# Altium PCB fosna.PcbDoc
Units mm, origin at the board's own origin, x right, y up, seen from the top; angles counter-clockwise.
Board outline 59.44 x 73.91 mm, 2 copper layers (Top Layer, Bottom Layer); 23 components, 31 nets, 131 pads, 21 vias.
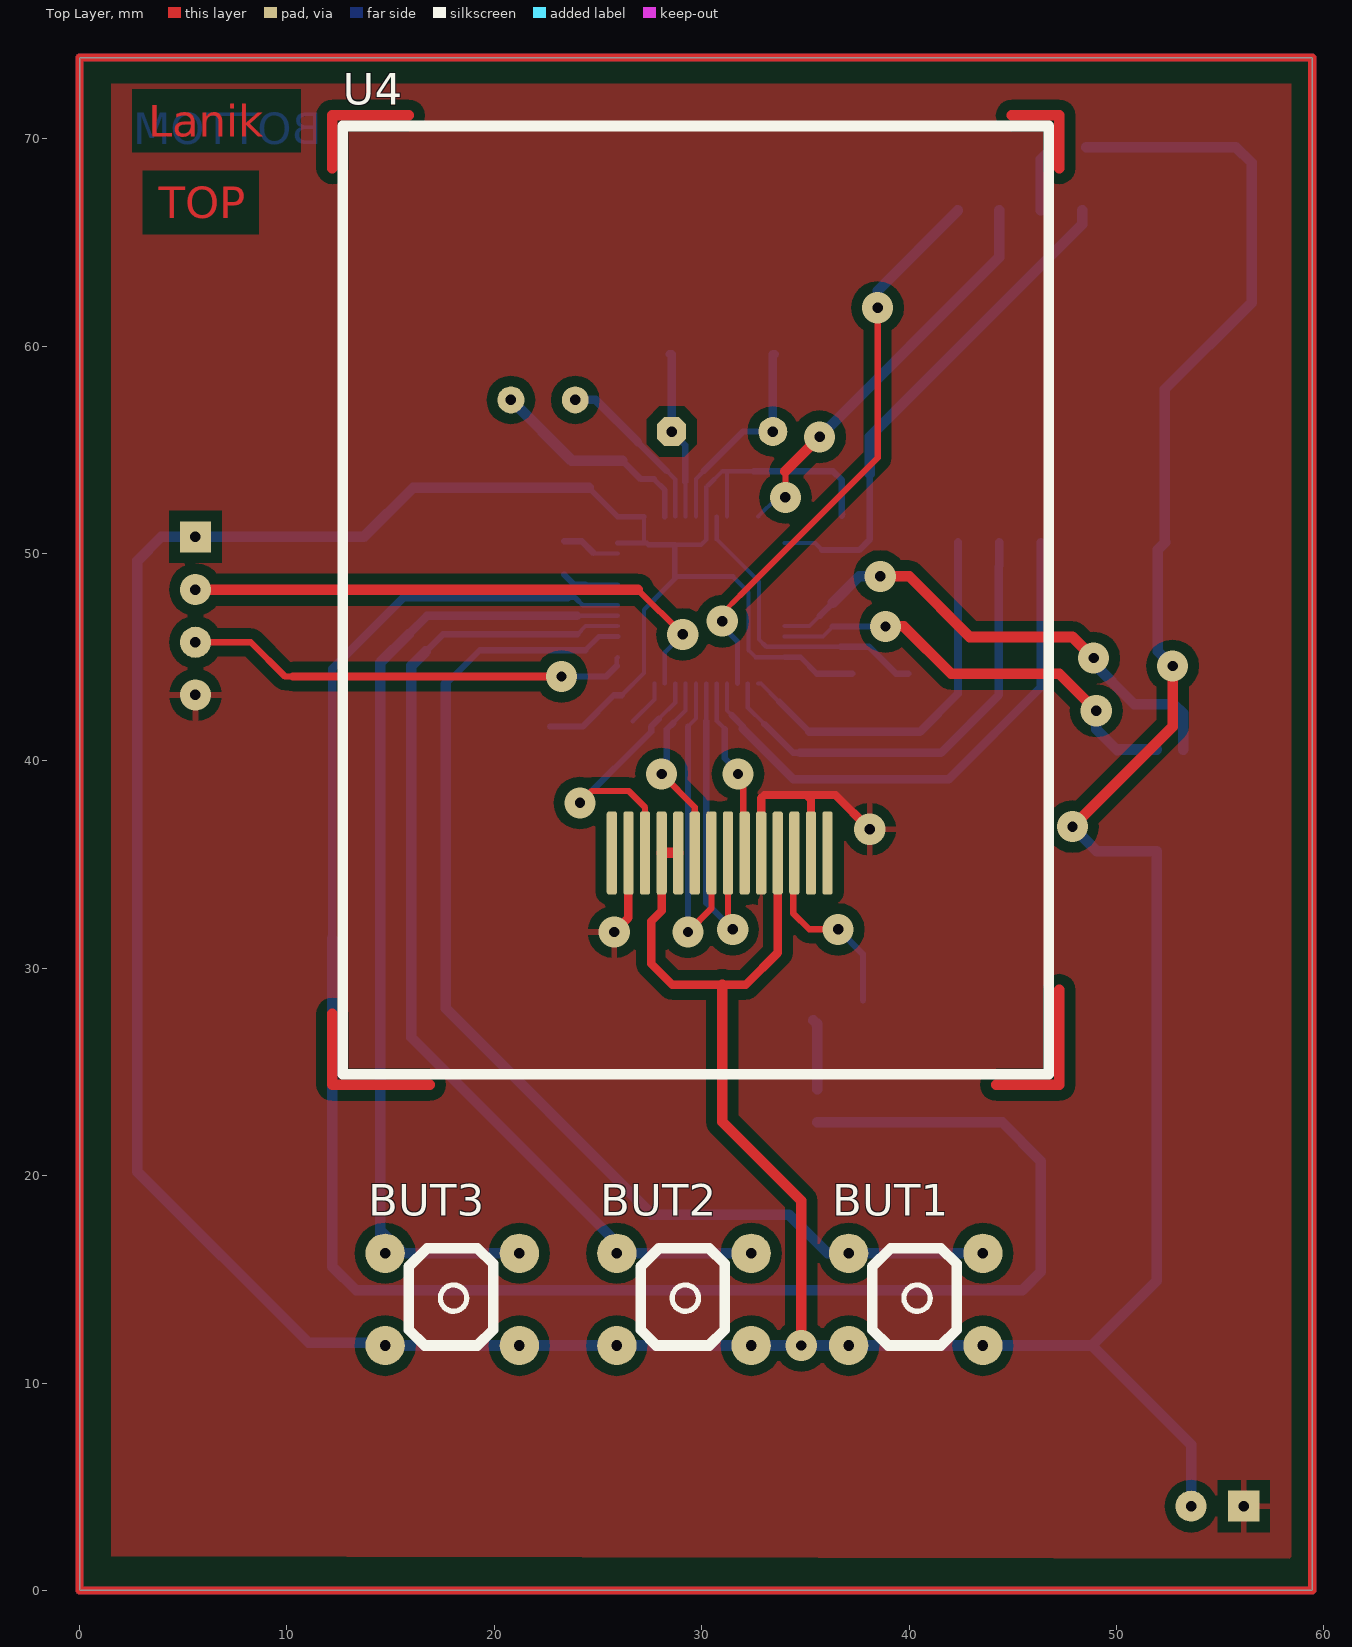
[diagram p0: Top Layer view]
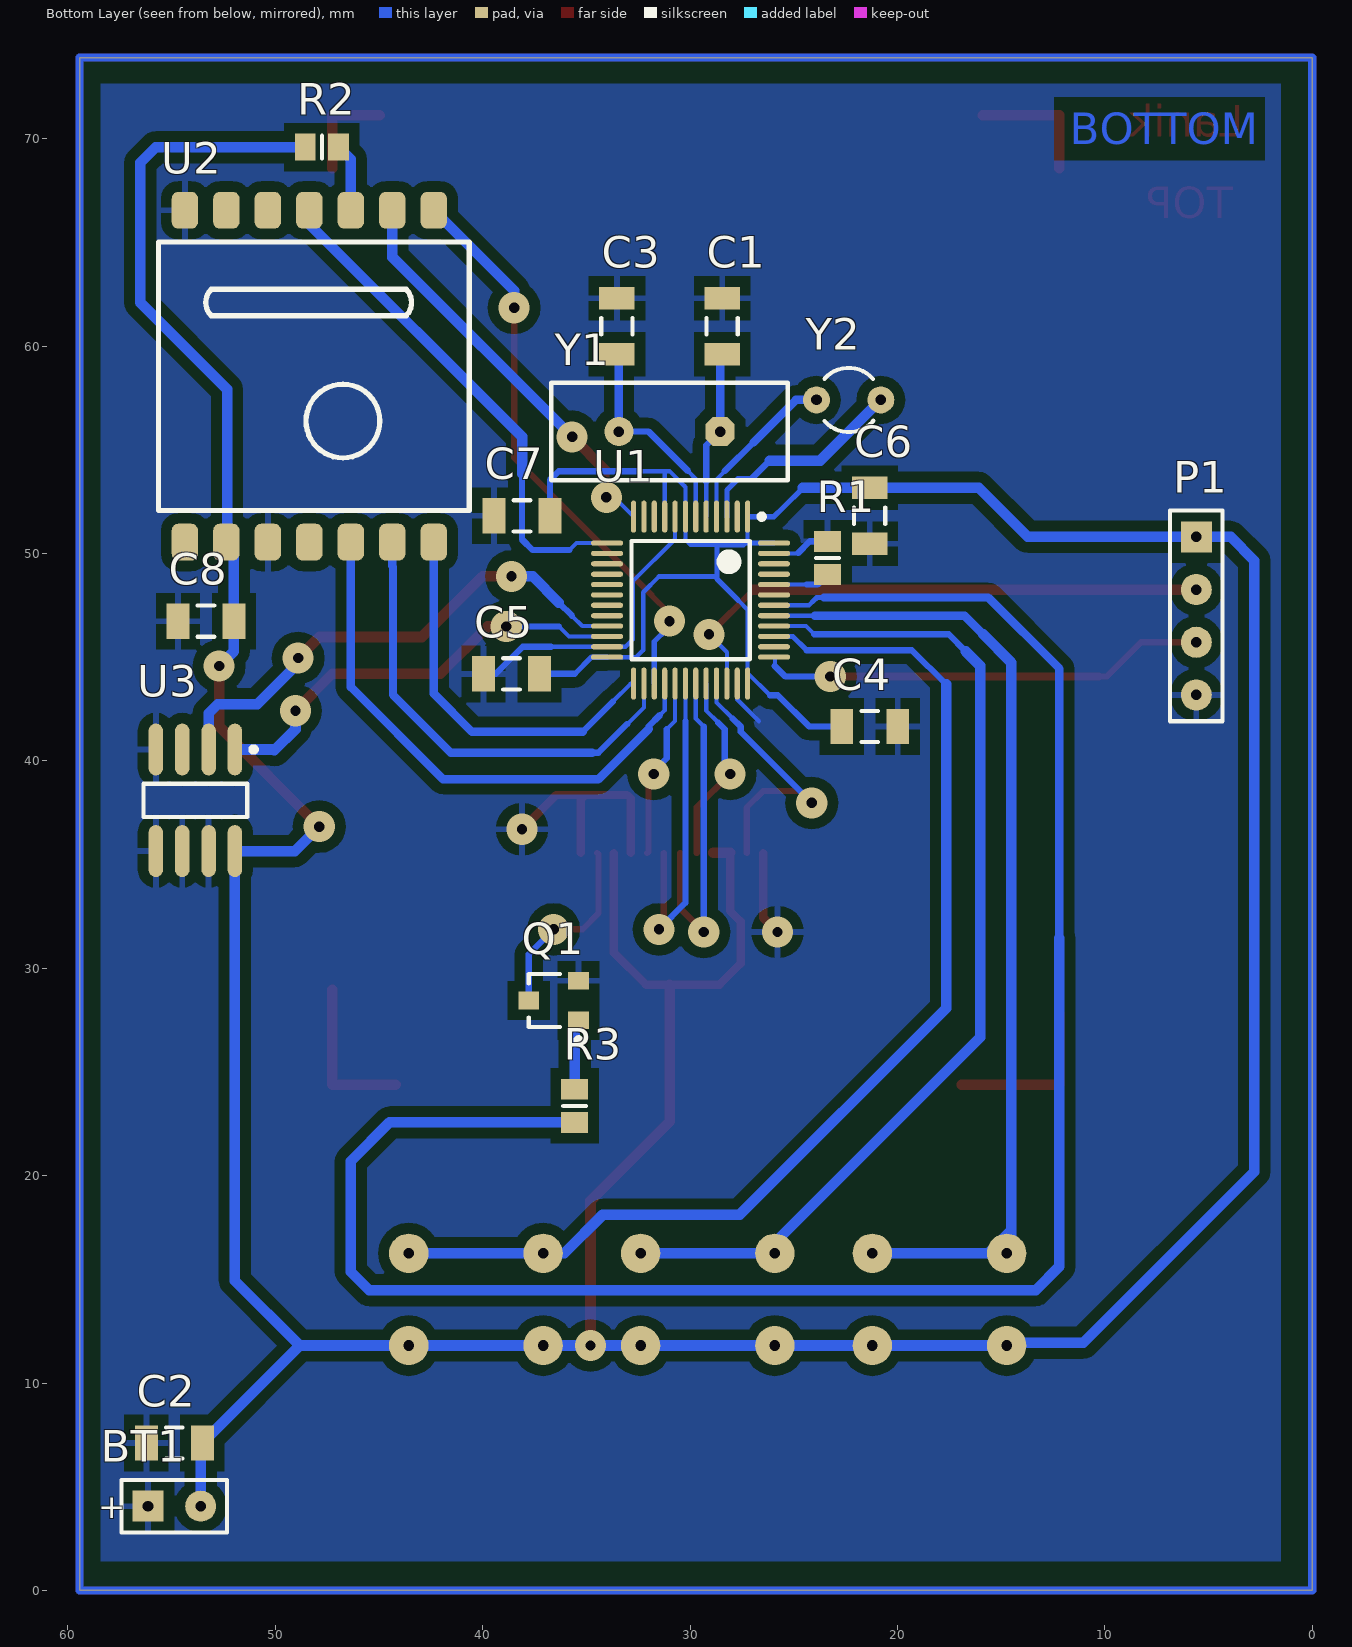
[diagram p1: Bottom Layer view, seen from below]

## Layer stack, top to bottom
Top Layer: signal copper 0.0356
Dielectric: dielectric 0.32, FR-4, Dk 4.8
Bottom Layer: signal copper 0.0356

## Board outline
0,0 0,73.914 59.436,73.914 59.436,0 0,0

## Design rules (kind name [scope] priority, off if disabled: settings)
AssemblyTestPointUsage [All] p1 off:
AssemblyTestpoint [All] p1 off: testpointundercomponent=TRUE minsize=1.016 maxsize=2.54 preferedsize=1.524 minholesize=0 maxholesize=1.016 preferedholesize=0.813 testpointgrid=0.025 usegrid=TRUE gridtolerance=0 allowsidetop=TRUE allowsidebottom=TRUE
Clearance Clearance_1 [(ObjectKind = 'Track') and innet(GND) vs Inpoly] p1: gap=-0.025
Clearance polygon [InPoly] p2: gap=0.508
Clearance mcu [withinroom('room_mcu')] p3: gap=0.203
Clearance displej [withinroom(room_displej)] p4: gap=0.254
Clearance [All] p5: gap=0.305
FabricationTestPointUsage [All] p1 off: valid=0 allowmultiple=FALSE
FabricationTestpoint [All] p1 off: side=3 testpointundercomponent=TRUE minsize=1.016 maxsize=2.54 preferedsize=1.524 minholesize=0 maxholesize=1.016 preferedholesize=0.813 testpointgrid=0.025 allowsidetop=TRUE allowsidebottom=TRUE usegrid=TRUE gridtolerance=0
HoleSize [All] p1 off: absolutevalues=TRUE maxlimit=2.54 minlimit=0.025 maxpercent=80.000 minpercent=20.000
HoleToHoleClearance [All] p1 off: gap=0.254 allowstackedmicrovias=TRUE
LayerPairs [All] p1 off: enforce=TRUE
MinimumSolderMaskSliver [All] p1 off: minsoldermaskwidth=0.254
NetAntennae [All] p1 off: netantennaetolerance=0
PasteMaskExpansion [All] p1 off: expansion=0
PolygonConnect [All] p1: connectstyle=Relief reliefconductorwidth=0.305 reliefentries=4 polygonreliefangle="90 Angle"
RoomDefinition room_displej [All] p1: confinementstyle=ConfineOut formatcopy=TRUE lockcomponents=FALSE outline 24.511,31.877 37.973,31.877 37.973,38.608 24.511,38.608
RoomDefinition room_mcu [InComponentClass('Components Class 1')] p2: confinementstyle=ConfineIn formatcopy=TRUE lockcomponents=FALSE outline 23.368,41.402 37.338,41.402 37.338,54.356 23.368,54.356
RoomDefinition main [InComponentClass('main')] p3: confinementstyle=ConfineIn formatcopy=TRUE lockcomponents=FALSE outline 0,65.405 59.309,65.405 59.309,0 0,0
RoomDefinition rfm [InComponentClass('rfm')] p4: confinementstyle=ConfineIn formatcopy=TRUE lockcomponents=FALSE outline 0,9.779 59.436,9.779 59.436,73.914 0,73.914
RoutingVias [All] p1: holewidth=0.5 width=1.7 viastyle="Through Hole" minholewidth=0.5 minwidth=1.5 maxholewidth=0.5 maxwidth=1.7
SilkToSilkClearance [All] p1 off: silktosilkclearance=0.254
SilkscreenOverComponentPads [All] p1 off: minsilkscreentomaskgap=0.254
SolderMaskExpansion [All] p1 off: expansion=0.102
Width mcu_width [WithinRoom('room_mcu')] p1: maxlimit=0.305 minlimit=0.203 preferedwidth=0.254
Width [All] p2: maxlimit=0.508 minlimit=0.305 preferedwidth=0.406 minimp=50.000000 maximp=50.000000 favimp=50.000000
16 further rules are at their usual default settings.

## Classes and differential pairs
component class "Components Class 1": U1
component class main: BT1 C1 C2 C3 C4 C5 C6 C7 P1 R1 U1 Y1 Y2
component class rfm: BUT1 BUT2 BUT3 C8 Q1 R2 R3 U2 U3 U4

## Components (designator, comment, footprint, x,y, rotation, side; value= is the part's Value field where it differs from the comment)
BT1 "Battery" BAT-2 54.864,4.064 r180 bottom
BUT1 "Tlacitko" TLACITKO 37.084,16.256 r0 top
BUT2 "Tlacitko" TLACITKO 25.908,16.256 r0 top
BUT3 "Tlacitko" TLACITKO 14.732,16.256 r0 top
C1 "Cap Semi" CAPC3216L 28.448,60.96 r90 bottom
C2 "Cap Semi" CAPC3216L 54.864,7.112 r180 bottom
C3 "Cap Semi" CAPC3216L 33.528,60.96 r90 bottom
C4 "Cap Semi" CAPC3216L 21.336,41.656 r0 bottom
C5 "Cap Semi" CAPC3216L 38.608,44.196 r180 bottom
C6 "Cap Semi" CAPC3216L 21.336,51.816 r90 bottom
C7 "Cap Semi" CAPC3216L 38.1,51.816 r180 bottom
C8 "Cap Semi" CAPC3216L 53.34,46.736 r0 bottom
P1 "Header 4" HDR1X4 5.588,50.8 r270 bottom
Q1 "BC817-40" SOT-23A 36.576,28.448 r90 bottom
R1 "Res Semi" RESC2012L 23.368,49.784 r90 bottom
R2 "Res Semi" RESC2012L 47.752,69.596 r0 bottom
R3 "Res Semi" RESC2012L 35.56,23.368 r270 bottom
U1 "STM32F101C6T6" LQFP48_L 29.972,47.752 r270 bottom
U2 "RFM12B" PCBComponent_1 54.356,66.548 r270 bottom
U3 "STLM75M2E" SO8_M 53.848,38.1 r270 bottom
U4 "ST7735" ST7735_DESKA 36.068,35.56 r0 top locked
Y1 "8MHz" HC-49U 30.988,55.88 r0 bottom
Y2 "32,768KHz" BCY-W2/D3.1 22.352,57.404 r90 bottom

## Footprints (in the part's own frame and the unit in brackets; to place one, negate y for a bottom-side part, rotate by r counter-clockwise, add the part's x,y. Pads: shape width x height; smd on the part's side, far side on the other; paste and mask are expansions set on the pad)
BAT-2 [mm] "Multicell Battery; 2 Leads"
  rect 1.5x1.5 hole 0.508: 1(-1.27,0)
  round 1.5 hole 0.508: 2(1.27,0)
  silkscreen extent -2.54,-1.27 2.54,1.27
BCY-W2/D3.1 [mm] "Crystal, Thru-Hole; 2 Leads; Body 3.1 x 8.2 mm (Dia.xH)"
  round 1.3 hole 0.508: 1(0,1.55) 2(0,-1.55)
  silkscreen extent -1.55,-1.19 1.55,1.17
CAPC3216L [mm] "Chip Capacitor, Body 3.2x1.6mm, IPC High Density"
  rect 1.1x1.7 smd: 1(-1.35,0) 2(1.35,0)
  silkscreen extent -0.4,-0.75 0.4,0.75, body extent -1.7,-0.9 1.7,0.9, height 1.3
HC-49U [mm] "Quartz Crystal, Thru-Hole; 2 Leads; Body 11.35 x 4.65 x 13.46 mm (LxWxH max)"
  oct 1.4x1.4 hole 0.508: 1(-2.44,0)
  round 1.4 hole 0.508: 2(2.44,0)
  silkscreen extent -5.7,-2.35 5.7,2.35
HDR1X4 [mm] "Connector; Header; 4 Position"
  rect 1.5x1.5 hole 0.508: 1(0,0)
  round 1.5 hole 0.508: 2(2.54,0) 3(5.08,0) 4(7.62,0)
  silkscreen extent -1.27,-1.27 8.89,1.27
LQFP48_L [mm] "Thin QFP, 48-Leads, Body 7x7mm, Pitch 0.5mm, IPC High Density"
  oval 1.55x0.25 smd: 1(-4.025,2.75) 2(-4.025,2.25) 3(-4.025,1.75) 4(-4.025,1.25) 5(-4.025,0.75) 6(-4.025,0.25) 7(-4.025,-0.25) 8(-4.025,-0.75) 9(-4.025,-1.25) 10(-4.025,-1.75) 11(-4.025,-2.25) 12(-4.025,-2.75) 25(4.025,-2.75) 26(4.025,-2.25) 27(4.025,-1.75) 28(4.025,-1.25) 29(4.025,-0.75) 30(4.025,-0.25) 31(4.025,0.25) 32(4.025,0.75) 33(4.025,1.25) 34(4.025,1.75) 35(4.025,2.25) 36(4.025,2.75)
  oval 0.25x1.55 smd: 13(-2.75,-4.025) 14(-2.25,-4.025) 15(-1.75,-4.025) 16(-1.25,-4.025) 17(-0.75,-4.025) 18(-0.25,-4.025) 19(0.25,-4.025) 20(0.75,-4.025) 21(1.25,-4.025) 22(1.75,-4.025) 23(2.25,-4.025) 24(2.75,-4.025) 37(2.75,4.025) 38(2.25,4.025) 39(1.75,4.025) 40(1.25,4.025) 41(0.75,4.025) 42(0.25,4.025) 43(-0.25,4.025) 44(-0.75,4.025) 45(-1.25,4.025) 46(-1.75,4.025) 47(-2.25,4.025) 48(-2.75,4.025)
  silkscreen extent -4.15,-2.85 2.85,3.55, body extent -3.5,-3.5 3.5,3.5, height 1.6
PCBComponent_1 [mil]
  rrect50% 70x50 smd: 1(0,0) 2(0,78.74) 3(0,157.48) 4(0,236.22) 5(0,314.96) 6(0,393.7) 7(0,472.44) 8(630,0) 9(630,78.74) 10(630,157.48) 11(630,236.22) 12(630,314.96) 13(630,393.7) 14(630,472.44)
  silkscreen extent 60,-50 570,540
RESC2012L [mm] "Chip Resistor, Body 2.0x1.3mm, IPC High Density"
  rect 1x1.3 smd: 1(-0.8,0) 2(0.8,0)
  silkscreen extent 0,-0.55 0,0.55, body extent -1.07,-0.7 1.07,0.7, height 2.54
SO8_M [mm] "SOIC, 8-Leads, Body 4.9x3.9mm, Pitch 1.27mm, IPC Low Density"
  oval 2.5x0.7 smd: 1(-2.45,1.905) 2(-2.45,0.635) 3(-2.45,-0.635) 4(-2.45,-1.905) 5(2.45,-1.905) 6(2.45,-0.635) 7(2.45,0.635) 8(2.45,1.905)
  silkscreen extent -2.57,-2.5 0.8,2.93, body extent -2,-2.5 2,2.5, height 1.75
SOT-23A [mm] "SOT-23; 3 Leads; Body 3.1 x 2.5 mm, inc. leads (LxW max)"
  rect 0.85x1 smd: 1(-0.95,-1.2) 2(0.95,-1.2) 3(0,1.2)
  silkscreen extent -2.05,-1.32 1.28,1.2
ST7735_DESKA [mm]
  rrect50% 0.5x4.016 smd: 1(0,0) 2(-0.8,0) 3(-1.6,0) 4(-2.4,0) 5(-3.2,0) 6(-4,0) 7(-4.8,0) 8(-5.6,0) 9(-6.4,0) 10(-7.2,0) 11(-8,0) 12(-8.8,0) 13(-9.6,0) 14(-10.4,0)
  silkscreen extent -23.37,-10.67 10.67,35.05, body extent -22.86,-10.16 10.16,34.54, height 3
TLACITKO [mm]
  round 1.9 hole 0.508: 1(0,0) 2(6.477,0) 3(0,-4.445) 4(6.477,-4.445)
  silkscreen extent 1.14,-4.44 5.21,0.25, body extent 1.14,-4.06 5.21,0.13, height 3

## Part data
BT1: "Multicell Battery"
C1 C2 C3 C4 C5 C6 C7 C8: "Capacitor (Semiconductor SIM Model)"
P1: "Header, 4-Pin"
Q1: "NPN General Purpose Amplifier"
R1 R2 R3: "Semiconductor Resistor"
U1: "STM32 ARM-based 32-bit MCU with 32 Kbytes Flash, 48-pin LQFP, Industrial Temperature"
U3: library part LM335AD, "Precision Temperature Sensor"
Y1: library part ECS-10-13-1, "Crystal Oscillator"
Y2: library part XTAL, "Crystal Oscillator"

## Via types
v1: diameter 1.5, hole 0.5, Top Layer to Bottom Layer, 21 vias

## Nets (pads, with @x,y where several pads share a name; then routed paths per layer and width w, separated by ;. In a path a pad name is that pad's centre, name@x,y a point inside that pad or via, vN(x,y) a via of type N, cw(c..) or ccw(c..) an arc to the next point about the centre after c; other vN are vias at no path point)
+3V3: BT1.2 BUT1.3 BUT1.4 BUT2.3 BUT2.4 BUT3.3 BUT3.4 C2.2 C4.2 C5.2 C6.2 C7.2 C8.1 P1.1 R2.2 U1.1 U1.7 U1.9 U1.24 U1.36 U1.48 U2.9 U3.8 U4.4 U4.10 U4.11 | length 270.6
  Top Layer w0.406: U4.11 U4.11 28.067,32.766 27.559,32.258 27.559,30.226 28.575,29.21 29.591,29.21 30.988,29.21 32.131,29.21 33.668,30.747 U4.4
  Top Layer w0.508: U4.11 U4.10 ; 30.988,29.21 30.988,22.606 34.798,18.796 v1(34.798,11.811) ; v1(47.879,36.83) 52.705,41.656 v1(52.705,44.577)
  Bottom Layer w0.203: 26.147,43.165 27.222,44.24 27.222,47.288 27.686,47.752 ; U1.1 27.222,50.629 27.349,50.502 ; 27.432,50.419 27.559,50.419 ; 28.702,50.419 29.972,50.419 30.226,50.673 30.222,50.677 U1.7 30.222,53.209 30.277,53.264 30.288,53.264 30.994,53.969 31.242,53.969 ; U1.9 31.222,53.949 31.242,53.969 ; 31.496,48.895 32.258,48.133 32.258,45.339 32.595,45.002 U1.24 ; 32.512,53.969 31.242,53.969 ; C7.2 C7.2@36.83,51.896
  Bottom Layer w0.254: 24.558,53.166 25.529,52.195 25.947,51.777 U1.1 ; U1.48 27.349,50.502 27.432,50.419 28.702,50.419 28.702,48.895 ; 27.686,47.752 28.702,48.768 28.702,48.895 ; 31.496,48.895 28.702,48.895 ; U1.24 34.754,45.002 35.56,44.196
  Bottom Layer w0.305: C4.2 24.257,41.656 25.766,43.165 26.147,43.165 ; 32.512,53.969 36.328,53.969 36.75,53.547 C7.2 ; 35.56,44.196 C5.2
  Bottom Layer w0.508: 24.558,53.166 C6.2 16.082,53.166 13.716,50.8 P1.1 3.937,50.8 2.794,49.657 2.794,20.193 11.049,11.938 14.605,11.938 BUT3.3 BUT3.4 BUT2.3 BUT2.4 BUT1.3 BUT1.4 48.815,11.811 ; v1(47.879,36.83) 49.059,35.65 U3.8 51.943,14.939 48.815,11.811 ; R2.2 55.753,69.596 56.515,68.834 56.515,62.103 52.324,57.912 52.324,50.578 U2.9 51.99,50.18 C8.1 51.99,45.292 v1(52.705,44.577) ; BT1.2 53.594,7.032 C2.2 48.815,11.811
BUTTON_DOWN: BUT2.1 BUT2.2 U1.40 | length 49.6
  Bottom Layer w0.203: 24.003,46.101 24.404,46.502 U1.40
  Bottom Layer w0.305: 16.7,45.276 17.526,46.101 24.003,46.101
  Bottom Layer w0.508: 16.7,45.276 16.002,44.577 16.002,26.67 25.908,16.764 BUT2.1 BUT2.2
BUTTON_ENTER: BUT3.1 BUT3.2 U1.41 | length 49
  Bottom Layer w0.203: 24.003,47.002 U1.41
  Bottom Layer w0.406: 15.869,46.107 16.751,46.99 23.991,46.99
  Bottom Layer w0.508: BUT3.1 BUT3.1@14.503,16.485 ; 15.869,46.107 14.503,44.742 BUT3.1@14.503,16.485 ; BUT3.2 15.621,16.256 14.503,17.374 BUT3.1@14.503,16.485
BUTTON_UP: BUT1.1 BUT1.2 U1.39 | length 55.7
  Bottom Layer w0.254: 24.384,45.339 25.047,46.002 U1.39
  Bottom Layer w0.305: 17.653,43.688 19.304,45.339 24.384,45.339
  Bottom Layer w0.508: 17.653,43.688 17.653,28.067 27.593,18.127 34.197,18.127 36.068,16.256 BUT1.2
DISP_BL: R3.2 U1.42 | length 96.1
  Bottom Layer w0.203: 24.083,47.68 24.261,47.502 U1.42
  Bottom Layer w0.254: 23.539,47.879 23.884,47.879 24.083,47.68
  Bottom Layer w0.406: 12.192,31.445 12.192,44.45 15.621,47.879 23.539,47.879
  Bottom Layer w0.508: 12.192,31.445 12.192,15.621 13.335,14.478 45.466,14.478 46.355,15.367 46.355,20.701 44.488,22.568 R3.2
DISP_CS: U1.33 U4.12 | length 13.6
  Top Layer w0.305: v1(24.13,37.973) 24.704,38.547 26.477,38.547 27.268,37.756 U4.12
  Bottom Layer w0.203: 27.94,42.037 28.722,42.819 U1.33
  Bottom Layer w0.305: v1(24.13,37.973) 27.559,41.402 27.559,41.656 27.94,42.037
DISP_MOSI: U1.31 U4.8 | length 16.4
  Top Layer w0.305: v1(29.337,31.75) 30.468,32.881 U4.8
  Bottom Layer w0.203: 29.337,41.656 29.722,42.041 U1.31
  Bottom Layer w0.305: v1(29.337,31.75) 29.337,41.656
DISP_RESET: U1.29 U4.6 | length 8.8
  Top Layer w0.305: U4.6 32.004,35.624 32.004,38.989 v1@32.131,39.116
  Bottom Layer w0.203: U1.29 30.722,41.922 31.115,41.529
  Bottom Layer w0.305: 31.115,41.529 31.115,40.132 v1@32.131,39.116
  other v1: 31.75,39.37
DISP_RS: U1.30 U4.7 | length 16.2
  Top Layer w0.305: U4.7 31.268,32.105 v1(31.496,31.877)
  Bottom Layer w0.203: U1.30 30.222,41.914 30.226,41.91
  Bottom Layer w0.305: 30.222,41.914 30.222,35.56 30.222,33.151 v1(31.496,31.877)
DISP_SCK: U1.32 U4.9 | length 9.3
  Top Layer w0.305: v1(28.067,39.37) 29.668,37.769 U4.9
  Bottom Layer w0.203: 28.639,41.846 29.222,42.43 U1.32
  Bottom Layer w0.305: v1(28.067,39.37) 28.321,39.624 28.321,41.529 28.639,41.846
FFIT: U1.13 U2.4 | length 24.6
  Bottom Layer w0.203: U1.13 35.477,50.502 35.814,50.165
  Bottom Layer w0.305: 35.814,50.165 37.592,50.165 38.1,50.673 38.1,53.848
  Bottom Layer w0.508: 38.1,53.848 38.1,55.626 48.356,65.882 U2.4
GND: BT1.1 C1.2 C2.1 C3.2 C4.1 C5.1 C6.1 C7.1 C8.2 P1.4 Q1.2 R1.2 U1.8 U1.23 U1.35 U1.47 U2.1 U2.10 U3.4 U3.5 U3.6 U3.7 U4.2 U4.5 U4.13 | length 35.3
  Top Layer w0.406: v1(25.781,31.75) 26.468,32.437 U4.13 ; U4.5 32.868,38.202 33.02,38.354 35.052,38.354 ; U4.2 35.268,38.138 35.052,38.354 ; v1(38.1,36.703) 36.449,38.354 35.052,38.354
  Bottom Layer w0.203: 24.78,50.023 24.78,50.002 U1.47 ; 26.67,41.91 27.722,42.962 U1.35 ; U1.8 30.722,50.673 30.734,50.673 32.766,48.641 32.766,45.847 33.111,45.502 U1.23 36.703,45.502
  Bottom Layer w0.305: R1.2 24.219,50.584 24.78,50.023 ; 36.703,45.502 38.064,45.502 39.37,44.196 C5.1
I2C2_SCL: U1.21 U3.2 | length 24.8
  Top Layer w0.508: v1(38.608,48.895) 40.005,48.895 42.926,45.974 47.879,45.974 v1(48.895,44.958)
  Bottom Layer w0.203: U1.21 35.199,46.502 35.687,46.99
  Bottom Layer w0.305: 35.687,46.99 36.328,47.631
  Bottom Layer w0.508: 36.328,47.631 37.592,48.895 v1(38.608,48.895) ; v1@48.768,44.831 50.863,42.735 52.768,42.735 53.213,42.291 U3.2
I2C2_SDA: U1.22 U3.1 | length 20.4
  Top Layer w0.508: v1(38.862,46.482) 39.751,46.482 42.037,44.196 47.244,44.196 v1(49.022,42.418)
  Bottom Layer w0.203: U1.22 35.842,46.002 36.322,46.482
  Bottom Layer w0.305: 36.322,46.482 38.1,46.482
  Bottom Layer w0.508: v1(49.022,42.418) 49.022,41.529 50.038,40.513 50.075,40.55 U3.1
NetC1_1: C1.1 U1.5 Y1.1 | length 8.2
  Bottom Layer w0.203: 29.21,53.467 29.222,53.455 U1.5
  Bottom Layer w0.305: Y1.1 29.21,55.218 29.21,53.467
  Bottom Layer w0.406: C1.1 28.548,59.61 Y1.1
NetC3_1: C3.1 U1.6 Y1.2 | length 10.3
  Bottom Layer w0.203: U1.6 29.722,53.598 30.099,53.975
  Bottom Layer w0.305: 30.099,53.975 32.004,55.88 Y1.2
  Bottom Layer w0.406: Y1.2 33.428,59.61 C3.1
NetQ1_1: Q1.1 R3.1 | length 3.4
  Bottom Layer w0.508: Q1.1 35.56,27.314 R3.1
NetQ1_3: Q1.3 U4.3 | length 9.3
  Top Layer w0.305: U4.3 34.417,35.509 34.417,32.639 35.179,31.877 v1(36.576,31.877)
  Bottom Layer w0.305: v1(36.576,31.877) 37.776,30.677 Q1.3
NetR1_1: R1.1 U1.44 | length 2.8
  Bottom Layer w0.203: 24.384,48.502 U1.44
  Bottom Layer w0.305: R1.1 23.85,48.502 24.384,48.502
NetR2_1: R2.1 U2.5 | length 3.3
  Bottom Layer w0.508: U2.5 46.356,69 R2.1
NetU1_3: U1.3 Y2.2 | length 10.5
  Bottom Layer w0.254: 27.686,53.594 28.222,53.058 U1.3
  Bottom Layer w0.305: 26.162,54.483 27.051,53.594 27.686,53.594
  Bottom Layer w0.508: Y2.2 23.723,54.483 26.162,54.483
NetU1_4: U1.4 Y2.1 | length 8.2
  Bottom Layer w0.203: 28.321,53.975 28.722,53.574 U1.4
  Bottom Layer w0.305: 26.924,55.372 28.321,53.975
  Bottom Layer w0.406: Y2.1 24.892,57.404 26.924,55.372
NIRQ: U1.12 U2.6 | length 19.8
  Top Layer w0.305: v1(34.036,52.705) 34.036,53.975
  Top Layer w0.508: 34.036,53.975 v1(35.687,55.626)
  Bottom Layer w0.203: U1.12 33.65,52.705 v1(34.036,52.705)
  Bottom Layer w0.508: v1(35.687,55.626) 44.356,64.295 U2.6
SPI2_CS: U1.25 U2.14 | length 18.7
  Bottom Layer w0.203: U1.25 32.854,43.727 33.732,42.849
  Bottom Layer w0.305: 33.732,42.849 35.179,41.402
  Bottom Layer w0.406: 35.179,41.402 40.513,41.402 42.356,43.245 U2.14
SPI2_MISO: U1.27 U2.7 | length 27.8
  Top Layer w0.254: v1(30.988,46.736) 30.988,47.117 31.877,48.006
  Top Layer w0.305: 31.877,48.006 38.481,54.61 v1(38.481,61.849)
  Bottom Layer w0.254: v1(30.988,46.736) 31.115,46.609 31.115,46.355 31.722,45.748 U1.27
  Bottom Layer w0.508: v1(38.481,61.849) 38.481,62.673 U2.7
SPI2_MOSI: U1.28 U2.12 | length 26.7
  Bottom Layer w0.203: U1.28 31.222,42.438 31.447,42.213
  Bottom Layer w0.305: 31.447,42.213 31.983,41.677 31.983,41.55
  Bottom Layer w0.406: 31.983,41.55 34.417,39.116 41.91,39.116 46.355,43.561 46.355,49.402 46.356,49.403 U2.12
SPI2_SCK: U1.26 U2.13 | length 22.7
  Bottom Layer w0.203: U1.26 32.222,42.581 33.02,41.783
  Bottom Layer w0.305: 33.02,41.783 34.417,40.386 34.722,40.386
  Bottom Layer w0.406: 34.722,40.386 41.529,40.386 44.323,43.18 44.323,49.37 44.356,49.403 U2.13
SWCLK: P1.3 U1.37 | length 21.8
  Top Layer w0.305: P1.3 8.255,45.72 9.906,44.069 10.287,44.069
  Top Layer w0.406: 10.287,44.069 v1@23.368,44.069
  Bottom Layer w0.203: 25.908,44.577 25.908,44.963 U1.37
  Bottom Layer w0.305: v1(23.241,44.069) 25.4,44.069 25.908,44.577
SWDIO: P1.2 U1.34 | length 27.1
  Top Layer w0.305: 26.924,48.26 v1(29.083,46.101)
  Top Layer w0.508: P1.2 26.924,48.26
  Bottom Layer w0.203: U1.34 28.222,45.24 v1(29.083,46.101)
TEMP_AD/TIM: U1.18
TEMP_SUPPLY: U1.19
pads on no net: U1.2 U1.10 U1.11 U1.14 U1.15 U1.16 U1.17 U1.20 U1.38 U1.43 U1.45 U1.46 U2.2 U2.3 U2.8 U2.11 U3.3 U4.1 U4.14
copper on no net: | length 26.8
  Top Layer w0.508: 12.192,27.813 12.192,24.384 16.891,24.384 ; 12.192,68.58 12.192,71.12 15.875,71.12 ; 44.196,24.384 47.244,24.384 47.244,28.956 ; 44.958,71.12 47.244,71.12 47.244,68.58

## Polygon pours and split planes (outlines as drawn)
GND on Bottom Layer "gnd_bottom" (solid, remove dead copper, pour order 1001): 1.524,1.397 1.524,72.644 58.42,72.644 58.42,1.397 1.524,1.397
GND on Top Layer "gnd_top" (solid, remove dead copper, pour order 1000): 1.524,1.651 1.524,72.644 58.293,72.644 58.42,72.644 58.42,1.524

## Other copper
Top Layer:
  text "Lanik" at 3.302,70.104 h1.52
  text "TOP" at 3.81,66.167 h1.52
Bottom Layer:
  text "BOTTOM" at 11.684,69.723 h1.52
Multi-Layer:
  lines w0.406: 0,0 59.436,0 59.436,73.914 0,73.914 0,0
  lines w0.508: -11.43,-6.35 3.81,-6.35 ; -3.81,-11.43 -3.81,-1.27 ; 57.15,-6.35 69.85,-6.35 ; 59.69,82.55 68.58,82.55 ; 63.5,-11.43 63.5,-1.27 ; 64.77,77.47 64.77,87.63

## Silkscreen, mask and mechanical layers (free items; w line width, h text height)
Mechanical 2:
  rectangle: -12.446,-13.716 72.39,88.265

## Dimensions
0,0 to 59.436,0 on Multi-Layer
59.436,0 to 59.436,73.914 on Multi-Layer

## Text inside footprints (layer, text, board x,y; h text height)
BT1: Bottom Overlay "+" at 58.534,3.487 h1.15